# Allegro board Iris.brd
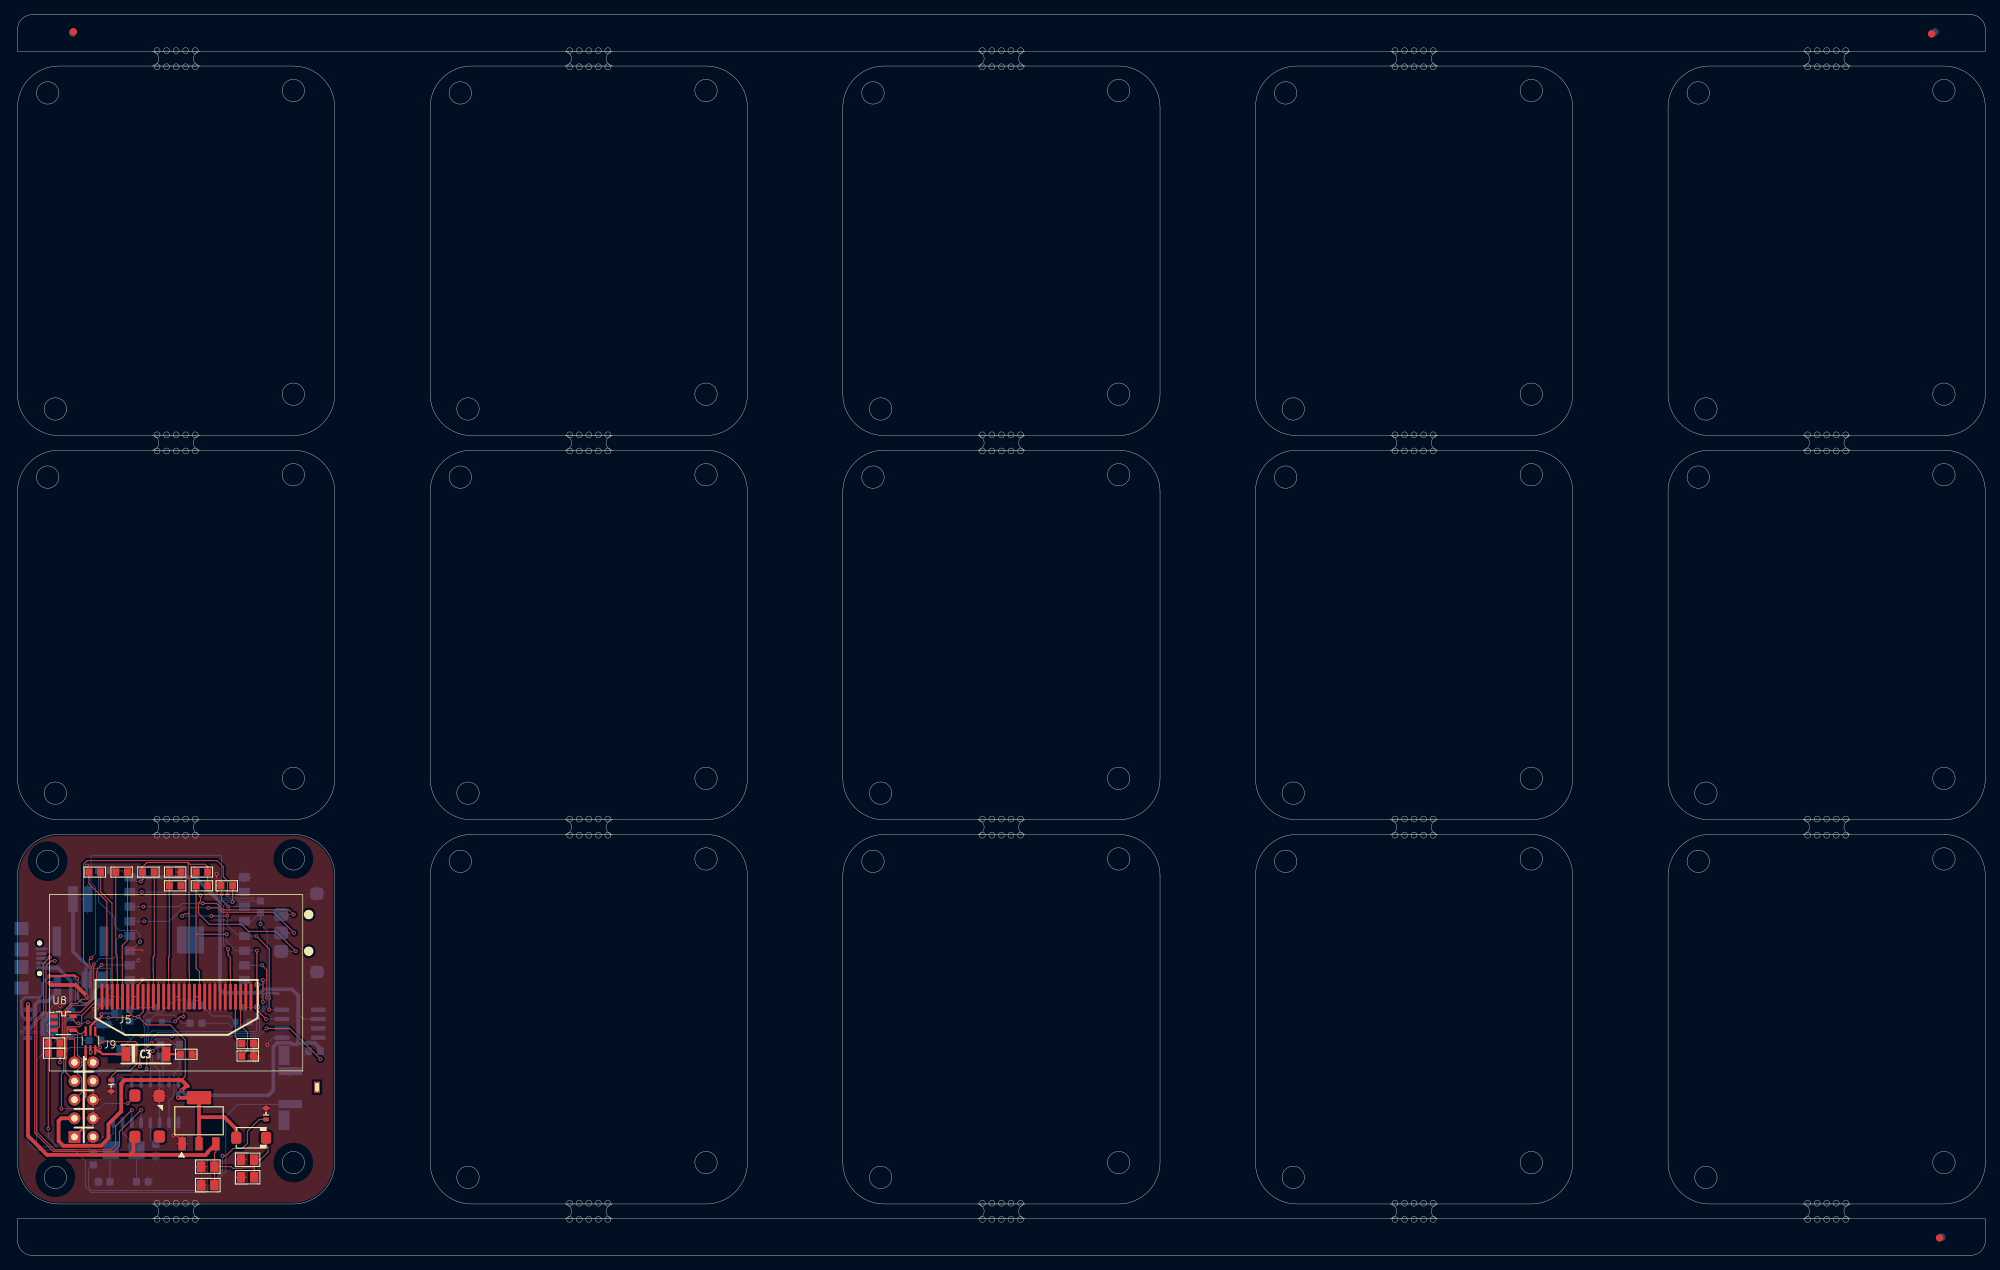
[diagram p0: board, top side]
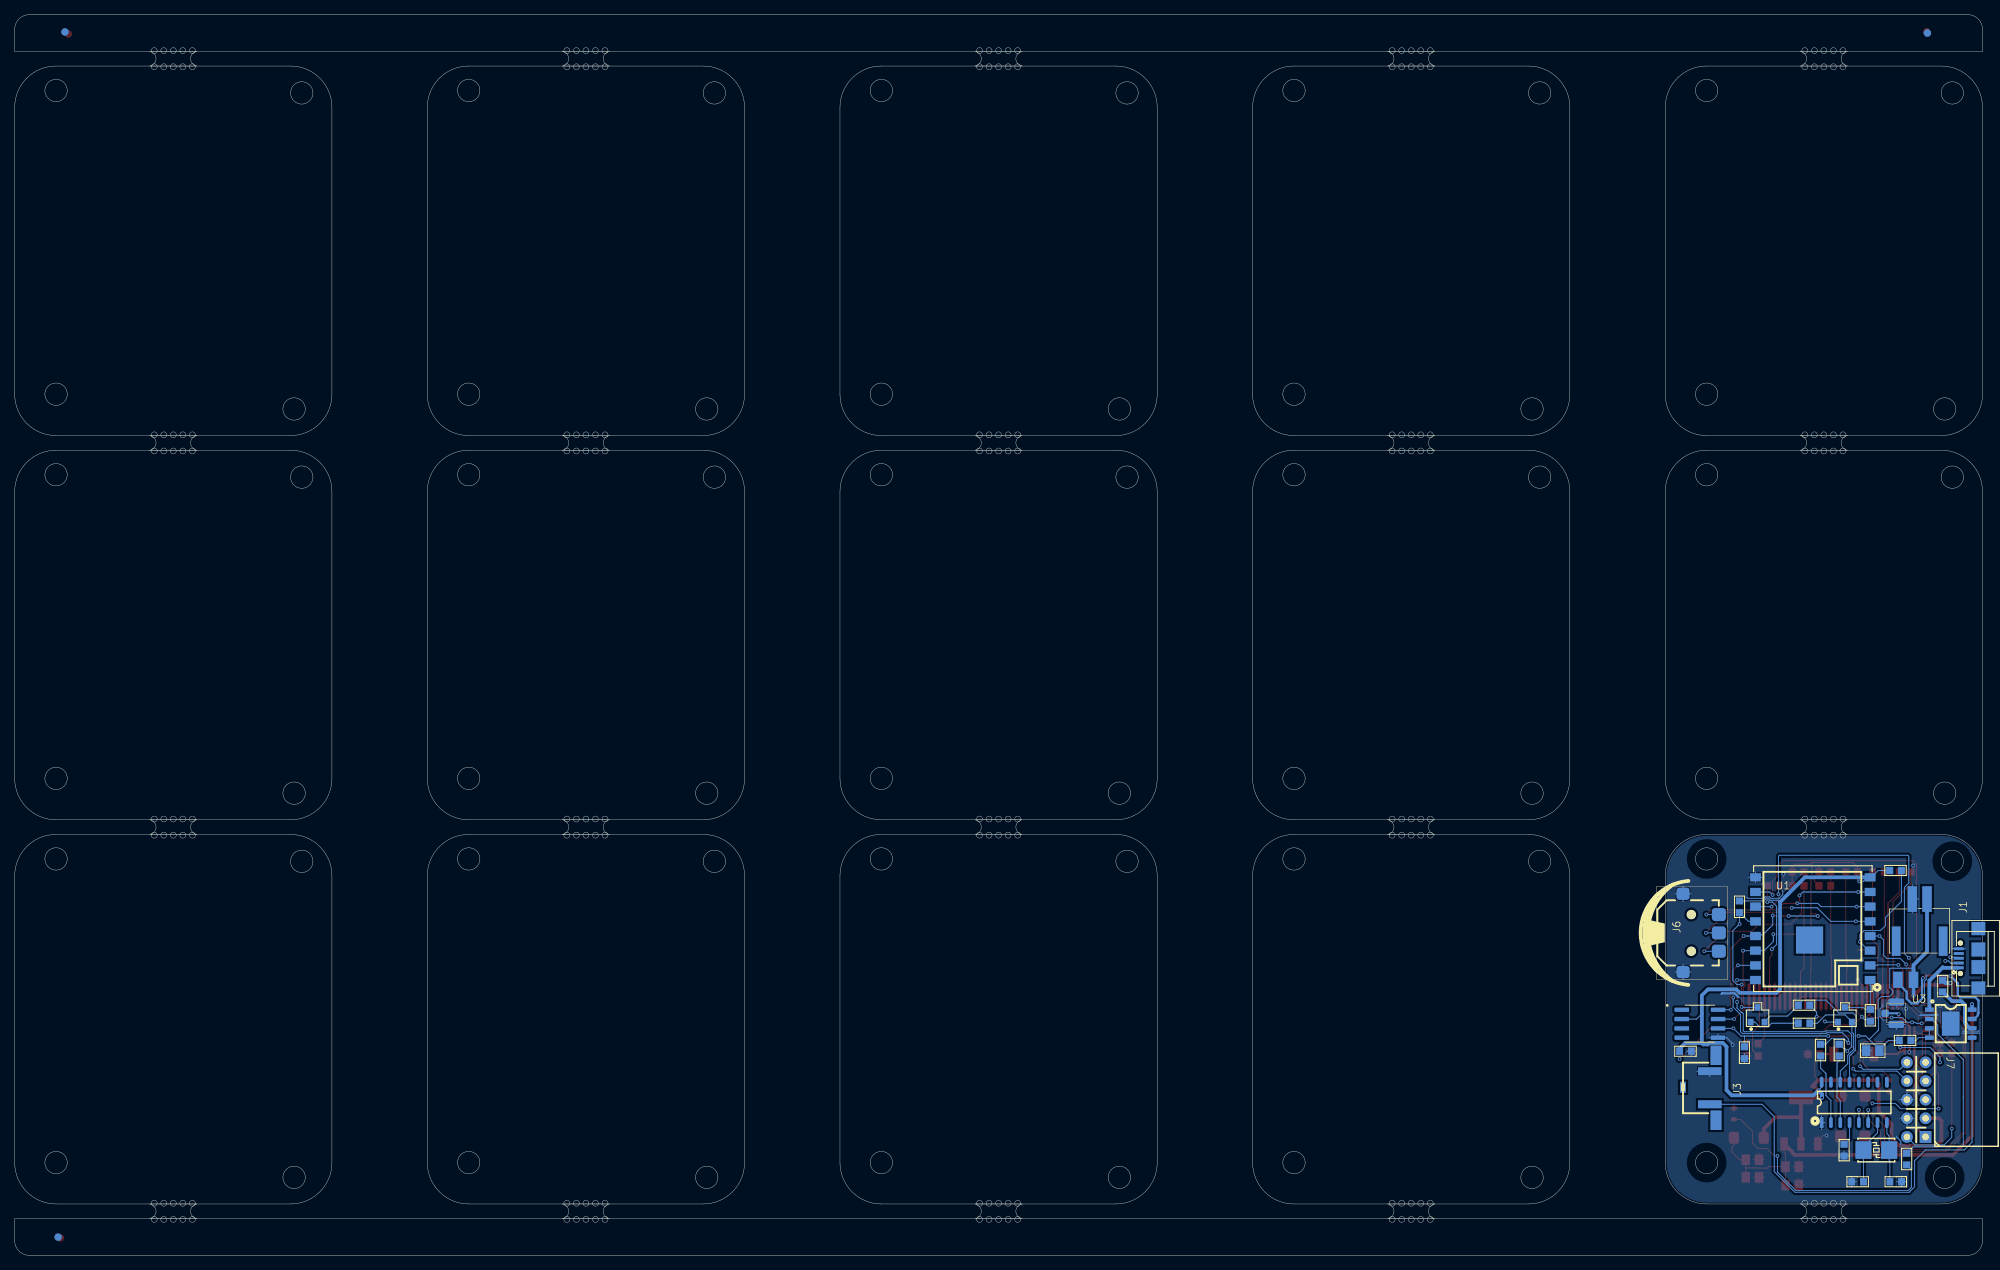
[diagram p1: board, bottom side, seen from below]

Outline 268.15 x 169.11 mm; copper layers: TOP, BOTTOM. Coordinates in mm from the lower left corner of the outline.

## Placement (name value [footprint] x y rotation side)
C1  100NF  [C0603]  18.86 13.54 90 bottom
C2  20pf  [C0603]  17.81 10.03 180 bottom
C3  20pf  [C0603]  12.62 10.03 180 bottom
C4  22UF  [C0805]  15.85 27.9 180 bottom
C5  22UF  [C0805]  32.26 10.64 180 top
C6  22UF  [C0805]  26.84 9.57 180 top
C7  22UF  [C0805]  26.84 12.09 180 top
C8  22UF  [C0805]  32.26 13.03 180 top
C9  1UF  [C0603]  9.74 52.24 0 top
C10  1UF  [C0603]  13.39 52.24 0 top
C11  4.7UF  [C0603]  20.68 52.24 0 top
C12  1UF  [C0603]  30.57 28.85 0 top
C13  1UF  [C0603]  30.57 27.17 0 top
C14  100NF  [C0603]  41.28 27.82 180 bottom
C15  100NF  [C0603]  32.44 28.43 270 bottom
D1  LED_GREEN  [LED_0603]  33.87 19.29 90 top
D2  LED_GREEN  [LED_0603]  12.76 23.12 270 top
D3  SS34  [DO-214AC]  31.84 16.02 0 top
J1  Micro USB  [MICRO_USB_2_0_SMT]  3.24 40.49 90 bottom
J2  PH2.0  [PH2_0_2PIN]  8.56 45.69 0 bottom
J3  KEY  [6X6-SMD-KEY]  38.56 22.84 90 bottom
J5  SH1106  [OLED-12864]  21.66 35.25 0 top
J6  wheel switch  [BUTTONPUSHLEVEL]  39.48 43.95 90 bottom
J7  hdr2_54-2x5p  [HDR2_54-2X5P]  9.03 21.22 90 bottom
J8  IPX-1  [IPX_SMA]  11.75 32.99 0 bottom
J9  antenna  [AB-C03]  16.8 29.3 270 top
L1  TFM252012ALMA4R7MTAA  [INDC2520X120N]  10.46 37.56 180 bottom
NOREF  -  [unnamed]  261.92 2.38 0 top
NOREF#2  -  [unnamed]  260.84 166.49 0 top
NOREF#3  -  [unnamed]  7.6 166.78 0 top
NOREF#4  -  [unnamed]  261.3 166.75 180 bottom
NOREF#5  -  [unnamed]  7.51 166.6 180 bottom
NOREF#6  -  [unnamed]  262.23 2.48 180 bottom
Q1  SI2302  [SOT23]  18.75 32.79 180 bottom
Q2  SI2302  [SOT23]  30.65 32.79 180 bottom
R1  0R  [R0603]  22.06 28.78 270 bottom
R2  0R  [R0603]  19.53 28.78 270 bottom
R3  1K  [R0603]  11.35 29.3 180 bottom
R4  5K1  [R0603]  25.12 34.09 180 bottom
R5  5K1  [R0603]  23.52 31.64 0 bottom
R7  0.5R  [R0603]  5.42 35.91 90 bottom
R8  4K7  [R0603]  17.03 52.24 0 top
R9  4K7  [R0603]  20.68 50.37 0 top
R10  4K7  [R0603]  24.33 52.24 0 top
R11  4K7  [R0603]  24.33 50.37 0 top
R12  560K  [R0603]  27.72 50.37 0 top
R13  4K7  [R0603]  15.29 33.52 270 bottom
R14  4K7  [R0603]  11.05 52.46 0 bottom
R15  4K7  [R0603]  33.11 46.71 90 bottom
R16  1K  [R0603]  5.79 27.54 180 top
R17  10K  [R0603]  4.19 28.94 0 top
R21  1K  [R0603]  10.33 13.93 270 bottom
R22  NC  [R0603]  23.79 27.41 180 top
U1  esp-07s  [ESP-07S]  26.64 47.95 90 bottom
U2  CH340G  [SOP16_L]  17.48 20.85 90 bottom
U3  IP5306  [ESOP-8]  4.33 31.84 270 bottom
U4  AMS1117_3V3  [SOT_223]  24.73 18.34 0 top
U5  WS2812  [LED_5050_WS2812B]  17.65 18.96 90 top
U6  DS3231MZ+TRL  [SOIC127P600X175-8N]  38.51 31.57 180 bottom
U8  SN74LVC1G14  [SOT23-5]  6.27 31.64 270 top
U9  XA17-G4K  [SOT-363]  9.94 29.28 90 top
Y1  12M_SMT  [OSC_5032-2P]  14.47 14.34 0 bottom

## Library data of the parts
C1-C15 = CAP NP
D1 D2 = LED_1
D3 = DIODE 34/DPAK_0
J1 = Micro USB
J2 = PH2.0
J3 = KEY
J5 = SH1106
J6 = wheel switch
J7 = hdr2_54-2x5p
J8 = IPX-1
J9 = antenna
L1 = TFM252012ALMA4R7MTAA
Q1 Q2 = IRLI540N/TO_2
R1-R5 R7-R17 R21 R22 = R
U1 = esp-07s
U2 = CH340G_0
U3 = IP5306_0
U4 = MCP1792/3_2
U5 = WS2812
U6 = DS3231MZ+TRL
U8 = SN74LVC1G14
U9 = XA17-G4K
Y1 = ZTA

## Footprints (pads in the part's own frame, mm; a bottom-side part is the same pattern mirrored in y, then rotated)
6X6-SMD-KEY
  rect 2.65x1.5 smd: (-4.425,-2.25) (4.425,-2.25)
  rect 1.5x0.8 hole 1.2x0.5: (0.075,2.25)
  rect 1.1x3.2 smd: 1(-2.25,-1.4) 2(2.25,-1.4)
AB-C03
  rect 2x1.2 smd: 1(1.87,-2.017) 2(1.87,3.444)
BUTTONPUSHLEVEL
  round 1.3 hole 1.219: (-2.5,0.2) (2.5,0.2)
  custom 1.778x1.905 smd: 1(-2.5,-3.556) 2(0,-3.556) 3(2.5,-3.556)
  custom 1.676x1.778 smd: 4(5.334,1.321) 5(-5.334,1.321)
C0603
  rect 0.95x1 smd: 1(0,0) 2(1.6,0)
C0805
  rect 1.15x1.45 smd: 1(0,0) 2(1.8,0)
DO-214AC
  custom 1.397x1.651 smd: 1(-2.032,0) 2(2.032,0)
ESOP-8
  rect 0.6x1.2 smd: 1(-1.643,-2.908) 2(-0.373,-2.908) 3(0.897,-2.908) 4(2.167,-2.908) 5(2.167,2.908) 6(0.897,2.908) 7(-0.373,2.908) 8(-1.643,2.908)
  rect 3.3x2.4 smd: 9(0.262,0)
ESP-07S
  rect 1.12x1.465 smd: 1(-10.424,-11.331) 2(-8.424,-11.331) 3(-6.424,-11.331) 4(-4.424,-11.331) 5(-2.424,-11.331) 6(-0.424,-11.331) 7(1.576,-11.331) 8(3.576,-11.331) 9(3.576,4.285) 10(1.576,4.285) 11(-0.424,4.285) 12(-2.424,4.285) 13(-4.424,4.285) 14(-6.424,4.285) 15(-8.424,4.285) 16(-10.424,4.285)
  rect 3.7x3.7 smd: 17(-4.974,-3.073)
HDR2_54-2X5P
  rect 1.6x1.6 hole 0.9: 1(-5.08,-1.27)
  round 1.6 hole 0.9: 2(-5.08,1.27) 3(-2.54,-1.27) 4(-2.54,1.27) 5(0,-1.27) 6(0,1.27) 7(2.54,-1.27) 8(2.54,1.27) 9(5.08,-1.27) 10(5.08,1.27)
INDC2520X120N
  rect 1.3x2.22 smd: 1(-1.06,0) 2(1.06,0)
IPX_SMA
  custom 1.016x1.016 smd: 1(1.524,0)
  custom 2.134x1.016 smd: 2(0,1.524) 3(0,-1.524)
LED_0603
  custom 0.559x0.762 smd: 1(-0.762,0) 2(0.762,0)
LED_5050_WS2812B
  custom 1.676x1.524 smd: 1(-2.819,1.651) 2(-2.769,-1.676) 3(2.769,-1.651) 4(2.819,1.651)
MICRO_USB_2_0_SMT
  rect 1.8x1.9 smd: (-4.05,-2.675) (4.05,-2.675)
  round 0.711 hole 0.7: (-2.075,-0.225) (2.075,-0.225)
  rect 1.9x1.9 smd: (-1.2,-2.675) (1.2,-2.675)
  rect 0.4x1.35 smd: 1(-1.3,0) 2(-0.65,0) 3(0,0) 4(0.65,0) 5(1.3,0)
OLED-12864
  custom 0.4x3.5 smd: 1(-10.15,0) 2(-9.45,0) 3(-8.75,0) 4(-8.05,0) 5(-7.35,0) 6(-6.65,0) 7(-5.95,0) 8(-5.25,0) 9(-4.55,0) 10(-3.85,0) 11(-3.15,0) 12(-2.45,0) 13(-1.75,0) 14(-1.05,0) 15(-0.35,0) 16(0.35,0) 17(1.05,0) 18(1.75,0) 19(2.45,0) 20(3.15,0) 21(3.85,0) 22(4.55,0) 23(5.25,0) 24(5.95,0) 25(6.65,0) 26(7.35,0) 27(8.05,0) 28(8.75,0) 29(9.45,0) 30(10.15,0)
OSC_5032-2P
  rect 2.2x2.4 smd: 1(-1.75,0) 2(1.75,0)
PH2_0_2PIN
  rect 1.2x4 smd: (-3.2,2.875) (3.2,2.875)
  rect 1.3x3.5 smd: 1(1,-2.875) 2(-1,-2.875)
R0603
  rect 0.95x1 smd: 1(0,0) 2(1.6,0)
SOIC127P600X175-8N
  custom 1.97x0.59 smd: 1(-2.475,1.905) 2(-2.475,0.635) 3(-2.475,-0.635) 4(-2.475,-1.905) 5(2.475,-1.905) 6(2.475,-0.635) 7(2.475,0.635) 8(2.475,1.905)
SOP16_L
  rect 1.5x0.5 smd: 1(-2.752,4.445)
  oval 1.5x0.5 smd: 2(-2.752,3.175) 3(-2.752,1.905) 4(-2.752,0.635) 5(-2.752,-0.635) 6(-2.752,-1.905) 7(-2.752,-3.175) 8(-2.752,-4.445) 9(2.752,-4.445) 10(2.752,-3.175) 11(2.752,-1.905) 12(2.752,-0.635) 13(2.752,0.635) 14(2.752,1.905) 15(2.752,3.175) 16(2.752,4.445)
SOT23
  rect 0.8x0.9 smd: 1(-0.95,-1) 2(0.95,-1) 3(0,1)
SOT23-5
  rect 0.508x1.016 smd: 1(-0.95,-1.3) 2(0,-1.3) 3(0.95,-1.3) 4(0.95,1.3) 5(-0.95,1.3)
SOT-363
  custom 1.3x0.3 smd: 1(-1.275,0.65) 2(-1.275,0) 3(-1.275,-0.65) 4(1.275,-0.65) 5(1.275,0) 6(1.275,0.65)
SOT_223
  rect 1.016x1.803 smd: 1(-2.3,-3.15) 2(0,-3.15) 3(2.3,-3.15)
  rect 3.302x1.803 smd: 4(0,3.15)
unnamed
  round 1.016 smd: (0,0)

## Nets
3V3: C14.1 D3.1(ANODE) J5.6(VBAT) J5.9(VDD) J7.3 R8.1 R9.2 R10.2 R11.2 R13.2 R14.2 R15.2 U1.8(VCC) U2.16(VCC) U4.2(VOUT) U4.4(VOUT_) U6.2(VCC) U8.5(VCC)
5V: C5.1 C6.1 C7.1 C8.1 D3.2(CATHODE) U3.8(VOUT) U4.3(VIN) U5.1(VDD)
GND: C1.1 C2.1 C3.2 C4.1 C5.2 C6.2 C7.2 C8.2 C11.2 C12.2 C13.2 C14.2 C15.2 D1.2(CATHODE) D2.2(CATHODE) J1.5(GND) J2.1 J3.2 J5.1(NC/GND) J5.7(VSS#7) J5.8(VSS#8) J5.10(NC) J5.12(BS2) J5.13(CS#) J5.15(D/C#) J5.16(R/W#) J5.17(E/RD#) J5.21(D3) J5.22(D4) J5.23(D5) J5.24(D6) J5.25(D7) J5.29(NC/) J5.30(NC/GND/) J6.4 J6.5 J7.4 J7.6 J8.2 J8.3 R12.1 R17.1 R22.1 U1.9(GND) U2.1(GND) U3.9(GND) U4.1(GND) U5.3(VSS) U6.5(GND) U8.3(GND) U9.2(GND)
ADC: J7.5 U1.2(ADC)
BAT: C4.2 C15.1 J2.2 L1.2 R3.1 R7.2 U6.6(VBAT)
BOOT: Q2.3(D) R15.1 U1.12(IO0)
BUTTON_A: J6.2 U1.5(IO14)
BUTTON_DOWN: J6.1 U1.7(IO13)
BUTTON_UP: J6.3 U1.6(IO12)
DTR#: Q2.2(S) R4.1 U2.13(DTR)
IO2: J7.7 U1.11(IO2)
IO16: J7.9 U1.4(IO16)
ISP_RX: J7.10 R1.1 U1.15(RX)
ISP_TX: J7.8 R2.1 U1.16(TX)
RF_BOARD: J9.1 U9.3(J2)
RF_OUT: J7.1 U9.1(J3)
RING: U1.10(IO15) U5.4(DIN)
RST: Q1.3(D) R13.1 U1.1(RST)
RTS#: Q1.2(S) R5.1 U2.14(RTS)
SCL: J5.18(D0) R10.1 U1.13(IO4) U6.8(SCL)
SDA: J5.19(D1) J5.20(D2) R11.1 U1.14(IO5) U6.7(SDA)
SIG_BOARD: J8.1(SIG) U9.5(J1)
USB_D+: J1.3(D+) U2.5(UD+)
USB_D-: J1.2(D-) U2.6(UD-)
V_IN: J1.1(VBUS) U3.1(VIN)
VTCL: D2.1(ANODE) R16.1 R17.2 U8.2(A) U9.4(V1)
VTCL_IN: J7.2 R16.2
N15621542: C1.2 U2.4(V3)
N15621550: Q1.1(G) R4.2
N15621598: Q2.1(G) R5.2
N15621710: C3.1 U2.8(XO) Y1.1
N15621738: C2.2 U2.7(XI) Y1.2
N15621988: R1.2 U2.2(TXD)
N15622004: R2.2 U2.3(RXD)
N15624178: R7.1 U3.6(BAT)
N15624252: R3.2 U3.3(LED2) U3.4(LED3)
N15625011: J3.1 U3.5(KEY)
N15626203: L1.1 U3.7(SW)
N15629286: C9.1 J5.2(C2P)
N15629352: C10.1 J5.4(C1P)
N15629653: J5.11(BS1) R8.2
N15630916: C9.2 J5.3(C2N)
N15630923: C10.2 J5.5(C1N)
N15630993: C11.1 J5.14(RES#) R9.1
N15631879: J5.26(IREF) R12.2
N15632070: C12.1 J5.27(VCOMH)
N15632325: C13.1 J5.28(VCC)
N15636223: R14.1 U1.3(EN)
N15654880: J9.2 R22.2
N15660228: U8.4(Y) U9.6(V2)
N15662312: R21.1 U3.2(LED1)
N15662512: D1.1(ANODE) R21.2

Pads without a net: J1 4; U1 17; U2 9 10 11 12 15; U5 2; U6 1 3 4; U8 1

## Via types
v1: diameter 0.508, hole 0.305, TOP to BOTTOM, 76 vias

## Routing (per net, layer and track width the routed paths; a pad name or vN(x,y) marks a point on that pad's centre or on a via; arc(x,y) is an arc through that point)
3V3: length 181.5
  TOP w0.127: v1(12.38,32.41) 15.04,32.41 15.48,32.84 ; R9.2 22.28,50.4 22.89,51.01 22.89,51.14 23.25,51.5 23.25,53.54 ; R11.2 R10.2 25.93,52.96 25.58,53.31 23.48,53.31 23.25,53.54 ; J5.9 17.11,33.19 v1(16.45,32.53) ; 15.48,32.84 15.79,32.53 v1(16.45,32.53) ; 15.48,32.84 15.01,33.31 J5.6 ; v1(16.45,32.53) 17.58,31.4 20.81,31.4 22.85,29.36 22.85,24.39 22.36,23.89 22.35,23.9 ; 23.25,53.54 17.64,53.54 17.03,52.93 R8.1 17.11,52.16 17.11,51.29 v1(16.8,50.97) ; v1(8.29,31.62) 8.04,31.62 7.57,32.09 U8.5
  TOP w0.5: D3.1 29.81,17.22 28.2,18.83 24.79,18.83 24.73,18.77 ; v1(21.86,21.49) U4.4 24.73,18.77 ; 24.73,18.77 U4.2 ; v1(22.37,22.47) 22.95,23.05 23.2,23.05 22.36,23.89 14.64,23.89 14.13,23.38 14.13,19.62 12.39,17.88 12.39,15.95 11.37,14.93 6.24,14.93 5.59,15.57 5.59,18.33 5.95,18.68 J7.3
  BOTTOM w0.127: v1(12.38,32.41) 10.9,32.41 10.25,31.76 v1(9.59,31.76) 9.15,31.76 9.01,31.62 v1(8.29,31.62) ; R13.2 15.48,32.11 16.03,32.11 v1(16.45,32.53) ; 27.59,48.15 27.84,48.4 28.94,48.4 29.13,48.6 29.5,48.6 29.79,48.31 R15.2 ; U6.2 38.96,32.21 38.24,32.92 ; R14.2 14.2,52.46 15.14,51.53 U1.8 ; v1(22.37,22.47) 21.92,22.92 U2.16 ; v1(16.8,50.97) 16.24,50.97 15.68,51.53
  BOTTOM w0.5: 38.24,28.94 38.24,28.94 38.24,35.43 37.42,36.25 33.56,36.25 33.09,35.78 28.07,35.78 27.59,36.26 27.59,48.15 24.21,51.53 U1.8 ; 38.24,28.94 38.05,28.75 37.44,28.75 37.22,28.97 35.4,28.97 34.88,28.44 34.88,22.51 34.18,21.81 23.03,21.81 v1(22.37,22.47) 21.86,21.96 v1(21.86,21.49) ; 38.24,28.94 40.51,28.94 41.28,28.17 C14.1
5V: length 66.8
  TOP w0.127: C7.1 29.1,12.09 29.32,11.87 30.56,11.87 30.61,11.92 32.24,11.92 32.26,11.9 ; C7.1 26.84,13.91 27.03,14.1 U4.3 ; C7.1 C6.1 ; 32.26,11.9 C8.1 33.09,13.03 34.14,14.08 34.14,14.74 33.87,15 D3.2 ; 32.26,11.9 C5.1
  TOP w0.5: v1(1.42,34.23) 1.42,16.29 4.02,13.69 15.29,13.69 ; 15.29,13.69 15.79,14.19 15.79,15.93 U5.1 ; 15.29,13.69 22.23,13.69 22.25,13.67 25.6,13.67 25.91,13.98 25.91,14.07 U4.3
  BOTTOM w0.5: U3.8 v1(1.42,34.23)
GND: length 191.3
  TOP w0.127: D2.2 12.76,22.82 ; D2.2 12.2,22.36 ; D2.2 13.32,22.36 ; D2.2 12.76,21.9 ; 28.31,33.32 J5.25 28.31,37.18 ; C6.2 25.79,9.57 ; C6.2 25.04,8.67 ; C6.2 24.29,9.57 ; C6.2 25.04,10.47 ; C8.2 30.46,13.93 ; C8.2 31.21,13.03 ; C8.2 29.71,13.03 ; 31.11,33.32 J5.29 31.11,37.18 ; J5.16 22.01,37.18 ; J5.16 J5.15 ; J5.16 22.01,33.32 ; D1.2 33.87,20.51 ; D1.2 33.31,20.05 ; D1.2 34.43,20.05 ; D1.2 33.87,19.6 ; 25.04,11.19 C7.2 ; C7.2 25.04,12.99 ; C7.2 25.79,12.09 ; C7.2 24.29,12.09 ; J5.15 21.31,37.18 ; J5.15 21.31,33.32 ; 3.54,28.94 R17.1 4.19,29.62 ; 9.98,28.21 v1(9.98,27.71) 9.98,27.58 ; 26.21,33.32 J5.22 26.21,37.18 ; 26.91,37.18 J5.23 26.91,33.32 ; J7.6 11.28,21.22 ; J7.6 10.3,22.2 ; J7.6 10.3,20.24 ; J7.4 10.3,19.66 ; J7.4 11.28,18.68 ; J7.4 10.3,17.7 ; 5.7,33.39 5.7,31.17 5.22,30.69 U8.3 ; 25.51,33.32 J5.21 25.51,37.18 ; 4.05,32.44 4.05,32.95 4.47,33.37 ; 19.21,37.18 J5.12 19.21,33.32 ; v1(9.45,53.13) 9.52,53.2 9.77,53.2 ; C13.2 32.82,27.17 ; C13.2 32.17,27.85 ; C13.2 31.52,27.17 ; C13.2 32.17,26.49 ; 19.91,37.18 J5.13 19.91,33.32 ; 27.07,50.37 R12.1 27.72,51.05 ; 22.43,15.58 21.68,16.33 v1(21.26,16.33) ; 22.43,15.58 22.43,16.27 ; 22.43,15.58 U4.1 ; 32.17,28.17 C12.2 ; C12.2 32.17,29.53 ; C12.2 32.82,28.85 ; R22.1 23.79,28.09 ; R22.1 24.44,27.41 ; R22.1 23.79,26.73 ; 19.3,20.71 U5.3 ; U5.3 19.3,22.75 ; U5.3 20.24,21.73 ; U5.3 18.36,21.73 ; 21.74,15.19 U4.1 ; U4.1 23.11,15.19 ; 14.98,41.51 15.11,41.64 16.95,41.64 17.08,41.51 ; 10.88,33.59 11.51,34.22 J5.1 ; 15.64,37.87 15.71,37.8 J5.7 J5.8 16.41,36.8 17.01,37.4 v1(17.01,37.6) ; 22.71,37.18 J5.17 22.71,33.32 ; 31.81,37.18 J5.30 31.81,33.32 ; 22.28,51.56 C11.2 ; C11.2 21.63,52.24 ; C11.2 22.28,52.92 ; 30.46,9.74 C5.2 ; C5.2 31.21,10.64 ; C5.2 29.71,10.64 ; 27.61,37.18 J5.24 27.61,33.32 ; 27.12,51.43 v1(27.12,51.99) ; 17.81,33.32 J5.10 17.81,37.18
  BOTTOM w0.127: J7.6 11.28,21.22 ; J7.6 9.32,21.22 ; J7.6 10.3,22.2 ; J6.4 40.8,50.3 ; J6.4 41.87,49.28 ; J6.4 40.8,48.27 ; J6.4 39.73,49.28 ; 32.44,26.18 C15.2 ; C15.2 33.12,26.83 ; C15.2 32.44,27.48 ; C15.2 31.76,26.83 ; C2.1 18.46,10.03 ; C2.1 17.16,10.03 ; C2.1 17.81,9.35 ; C2.1 17.81,10.71 ; 8.73,48.57 J2.1 ; J2.1 9.56,50.49 ; J2.1 9.56,46.64 ; 9.32,18.68 J7.4 ; J7.4 11.28,18.68 ; J7.4 10.3,17.7 ; 6.05,32.69 6.54,32.69 6.56,32.7 7.92,32.7 7.93,32.69 8.55,32.69 8.56,32.68 ; 39.68,27.14 C14.2 ; C14.2 40.33,27.82 ; C14.2 39.03,27.82 ; U1.9 31.83,51.53 ; U1.9 30.01,51.53 ; U1.9 30.92,50.79 ; U1.9 30.92,52.26 ; 13.44,32.01 13.97,32.54 13.97,33.58 13.6,33.95 13.6,34.21 ; J6.5 41.87,38.62 ; J6.5 39.73,38.62 ; J6.5 40.8,39.63 ; J6.5 40.8,37.6 ; 11.02,9.35 C3.2 ; C3.2 10.37,10.03 ; C3.2 11.02,10.71 ; C3.2 11.67,10.03 ; 18.18,13.54 C1.1 ; C1.1 19.54,13.54 ; C1.1 18.86,14.19 ; C1.1 18.86,12.89 ; U3.9 4.33,33.42 5.07,34.16 5.09,34.16 ; 11.7,16.22 11.7,16.14 11.13,15.57 11.13,15.13 ; J8.3 11.75,35.2 ; J8.3 11.75,33.83 ; J8.3 12.99,34.51 ; 37.16,24.36 J3.2 38.94,25.09 ; 7.9,34.45 7.9,37.37 7.67,37.6 7.67,38.08 7.56,38.19 ; U2.1 21.92,19.03 ; U2.1 22.35,18.1 ; U2.1 21.5,18.1 ; U2.1 21.92,17.17 ; 10.5,31.47 J8.2 ; J8.2 12.99,31.47 ; J8.2 11.75,30.78 ; 2.67,30.47 2.57,30.57 2.21,30.57 2.1,30.45 0.74,30.45 0.6,30.59 0.37,30.59 ; 6.15,32.86 8.48,32.86 ; 15.85,27 C4.1 ; C4.1 15.85,28.8 ; C4.1 15.1,27.9 ; C4.1 16.6,27.9 ; 34.05,28.46 v1(34.05,28.67) 34.05,28.86 34.86,29.67 U6.5 ; 4.09,41.79 J1.5 2.39,41.79 ; U6.5 37.2,29.67 ; U6.5 36.03,30.14 ; 0.36,30.28 2.67,30.28 2.7,30.31 ; 32.15,48.78 32.03,48.66 29.8,48.66 29.61,48.85 29.03,48.85 28.84,48.66 27.72,48.66 27.22,49.16 27.22,49.71
  BOTTOM w0.3: 35.57,35.61 35.46,35.72 33.78,35.72 33.25,35.19
  vias: v1(5.78,34) v1(10.41,33.62) v1(16.47,40.2)
ADC: length 27.4
  TOP w0.127: J7.5 8.75,22.21 8.75,24.17 8.16,24.76 8.16,25.3 8.75,25.89 8.75,26.71 8.16,27.3 8.16,30.08 6.99,30.08 6.86,30.21 6.86,31.03 6.99,31.16 8.46,31.16 8.75,31.45 8.75,32.69 10.75,34.69 10.75,38.66 10.87,38.78 10.87,39 v1(11.46,39.59)
  BOTTOM w0.127: U1.2 14.38,39.53 14.32,39.59 v1(11.46,39.59)
BAT: length 73.2
  TOP w0.127: v1(16.88,29.9) v1(21.03,29.9) ; v1(33.94,30.94) 37.09,30.94 v1(41.28,26.75)
  TOP w0.5: v1(9.4,35.37) 7.92,36.85 4.64,36.85 v1(4.37,37.12)
  BOTTOM w0.127: 15.43,29.43 15.9,29.9 v1(16.88,29.9) ; 15.43,29.43 14.05,28.05 ; 15.43,29.43 14.17,30.69 14.17,32.24 14.23,32.3 14.23,34.82 13.77,35.28 12.66,35.28 12.23,35.71 12.23,36.07 12.65,36.49 12.65,39.05 12.56,39.14 9.68,39.14 9.4,38.86 ; R3.1 12.8,29.3 14.05,28.05 ; C15.1 32.44,29.87 32.41,29.9 ; v1(21.03,29.9) 32.41,29.9 ; 32.41,29.9 32.91,29.9 v1(33.94,30.94) U6.6 ; 14.05,28.05 C4.2
  BOTTOM w0.5: v1(4.37,37.12) 5.03,37.12 R7.2 ; v1(9.4,35.37) L1.2 9.4,39.56 7.56,41.4 J2.2
BOOT: length 19
  TOP w0.127: v1(32.82,33.85) v1(32.82,36.92)
  BOTTOM w0.127: v1(32.82,36.92) 33.47,36.92 34.02,37.47 34.02,44.24 v1(33.11,45.15) R15.1 33.08,46.71 31.9,45.53 U1.12 ; v1(32.82,33.85) 32.76,33.79 Q2.3
BUTTON_A: length 26.3
  TOP w0.127: v1(37.69,43.95) 34.87,46.77 27.9,46.77 27.3,47.37 v1(25.99,47.37)
  BOTTOM w0.127: U1.5 v1(17.26,45.53) 20.68,45.53 22.53,47.37 v1(25.99,47.37) ; J6.2 v1(37.69,43.95)
BUTTON_DOWN: length 29.8
  TOP w0.127: v1(37.92,41.45) 35.21,44.16 31.47,44.16 30.5,45.13 26.15,45.13 24.68,46.6 24.68,48.04 24.94,48.3 v1(24.94,49.06)
  BOTTOM w0.127: J6.1 v1(37.92,41.45) ; v1(24.94,49.06) 24.47,49.53 v1(16.93,49.53) U1.7
BUTTON_UP: length 24.8
  TOP w0.127: v1(25.24,47.97) 27.12,47.97 28.01,47.08 28.93,47.08 28.94,47.09 36.99,47.09 v1(37.63,46.45)
  BOTTOM w0.127: U1.6 v1(17.16,47.53) 21.99,47.53 22.44,47.97 v1(25.24,47.97) ; J6.3 v1(37.63,46.45)
DTR#: length 24.1
  BOTTOM w0.127: Q2.2 29.7,31.84 28.93,32.61 26.57,32.61 25.12,34.07 R4.1 25.12,34.12 24.51,34.73 24.13,34.73 24.07,34.78 21.33,34.78 19.58,33.03 17.66,33.03 17.21,32.58 17.21,31.26 17.33,31.14 17.33,27.94 18.11,27.15 U2.13
IO2: length 62
  TOP w0.127: v1(27.8,49.21) 27.8,48.47 v1(28.74,47.53) ; v1(10.04,40.55) 9.78,40.29 9.78,39.63 10.13,39.28 10.13,35.04 9.17,34.08 7.46,34.08 6.35,32.97 6.35,29.98 6.71,29.62 6.71,28.22 6.71,26.86 6.57,26.72 6.57,24.95 J7.7
  BOTTOM w0.127: v1(10.04,40.55) 10.64,41.15 10.64,50.15 10.04,50.76 10.04,54.4 10.17,54.53 27.67,54.53 27.8,54.4 v1(27.8,49.21) ; U1.11 v1(28.74,47.53)
IO16: length 24.5
  TOP w0.127: v1(10.39,39.65) 10.39,34.94 8.6,33.15 6.89,33.15 6.6,32.87 6.6,30.09 7.19,29.5 7.76,29.5 J7.9
  BOTTOM w0.127: U1.4 v1(14.02,43.53) 13.49,42.99 13.49,40.91 13.05,40.47 11.21,40.47 v1(10.39,39.65)
ISP_RX: length 43.1
  TOP w0.127: v1(33.96,35.13) 33.96,38.91 v1(33.34,39.53) ; v1(16.68,25.76) 16.68,27.36 v1(18.28,28.96)
  BOTTOM w0.127: v1(33.96,35.13) 33.96,34.69 33.99,34.66 33.99,33.84 32.97,32.82 32.97,30.49 32.7,30.23 21.33,30.23 21.21,30.35 19.09,30.35 18.28,29.53 v1(18.28,28.96) 18.9,29.58 20.57,29.58 21.37,28.78 R1.1 ; U1.15 v1(33.34,39.53) ; J7.10 11.24,25.36 16.28,25.36 v1(16.68,25.76)
ISP_TX: length 39.7
  TOP w0.127: v1(18.42,27.83) 17.61,27.02 v1(17.61,25.43) ; v1(33.44,37.53) v1(33.44,34.54)
  BOTTOM w0.127: v1(33.44,34.54) 33.44,33.71 32.83,33.1 32.73,33.1 32.6,32.97 32.6,30.61 32.47,30.48 21.44,30.48 21.32,30.6 18.35,30.6 17.83,30.09 17.83,28.42 v1(18.42,27.83) 18.76,28.17 18.89,28.17 19.5,28.78 R2.1 ; J7.8 11.64,25.11 17.28,25.11 v1(17.61,25.43) ; U1.16 v1(33.44,37.53)
RF_BOARD: length 4.4
  TOP w0.29: J9.1 11.59,27.43 11.22,27.79 11,27.79 10.79,28.01 U9.3
RF_OUT: length 12.6
  TOP w0.29: U9.1 9.29,27.08 9.26,27.05 9.26,26.78 9.23,26.74 9.23,23.32 9.26,23.28 9.26,21.63 8.99,21.36 8.99,18.54 9.04,18.49 9.04,17.42 J7.1
RING: length 73.5
  TOP w0.127: v1(28.6,49.14) 28.6,51.03 28.02,51.61 28.02,52.96 27.18,53.79 9.48,53.79 9,53.31 9,40.05 9.88,39.17 9.88,35.22 9.58,34.93 8.75,34.93 8.16,34.33 7.6,34.33 7.35,34.33 6.1,33.08 6.1,29.88 6.45,29.52 6.45,28.12 6.45,26.96 6.31,26.82 6.31,25.06 5.98,24.72 v1(5.98,19.99) ; U5.4 16,21.7 v1(15,20.71)
  BOTTOM w0.127: v1(15,20.71) 11.88,20.71 11.16,19.99 v1(5.98,19.99) ; v1(28.6,49.14) 28.98,49.53 U1.10
RST: length 7.6
  BOTTOM w0.127: U1.1 15.31,36.78 15.29,36.76 R13.1 15.98,33.52 16.25,33.79 Q1.3
RTS#: length 15.6
  BOTTOM w0.127: U2.14 19.38,25.1 18.37,26.12 18.37,27.25 17.58,28.04 17.58,30.19 17.8,30.41 Q1.2 17.8,31.84 18.73,32.77 21.36,32.77 22.49,31.64 R5.1
SCL: length 43.1
  TOP w0.127: 23.38,46.57 23.38,51.27 24.33,52.22 R10.1 ; 23.38,46.57 22.77,46.57 v1(22.45,46.25) ; 23.38,46.57 23.38,38.69 23.41,38.66 J5.18 ; v1(26.41,46.25) 28.52,46.25 v1(28.59,46.32) ; v1(32.53,43.53) 34.29,41.77 34.29,35.42 34.4,35.31 34.4,34.95 34.29,34.84 v1(34.29,33.48)
  BOTTOM w0.127: U6.8 v1(34.29,33.48) ; v1(28.59,46.32) 28.59,45.04 29.94,43.69 30.76,43.69 U1.13 v1(32.53,43.53) ; v1(22.45,46.25) v1(26.41,46.25)
SDA: length 38.2
  TOP w0.127: v1(32.62,41.53) 32.62,37.35 32.37,37.1 32.37,36.74 32.56,36.55 32.56,34.23 32.37,34.03 32.37,33.67 32.63,33.41 32.65,33.41 v1(33.85,32.21) ; 24.33,43.77 R11.1 ; 24.33,43.77 v1(28.5,43.77) ; 24.33,43.77 24.33,39.14 24.81,38.66 J5.20 J5.19
  BOTTOM w0.127: v1(28.5,43.77) 28.5,42.77 29.74,41.53 U1.14 v1(32.62,41.53) ; U6.7 v1(33.85,32.21)
SIG_BOARD: length 5
  TOP w0.29: U9.5 9.94,31.25 10.89,32.2 11.13,32.2 11.42,32.49 v1(11.42,32.87)
  BOTTOM w0.29: J8.1 11.54,32.99 v1(11.42,32.87)
USB_D+: length 46.8
  TOP w0.127: v1(4.39,40.62) 3.49,39.72 3.49,38.71 3.56,38.64 3.56,33.18 2.36,31.98 2.36,16.68 4.91,14.13 13.1,14.13 13.89,14.92 13.89,16.88 v1(16.84,19.84)
  BOTTOM w0.127: J1.3 3.37,40.62 v1(4.39,40.62) ; U2.5 v1(16.84,19.84)
USB_D-: length 46
  TOP w0.127: v1(5.08,40.13) 4.58,40.13 4.01,39.56 4.01,39.56 3.88,39.43 3.88,33.14 2.63,31.89 2.63,16.81 5.05,14.39 12.68,14.39 13.37,15.07 13.37,17.61 v1(15.57,19.82)
  BOTTOM w0.127: U2.6 v1(15.57,19.82) ; v1(5.08,40.13) 4.63,40.13 4.34,39.84 J1.2
V_IN: length 8.7
  BOTTOM w0.5: U3.1 7.24,37.42 5.4,39.26 5.33,39.19 J1.1
VTCL: length 28.7
  TOP w0.127: 11.52,29.12 11.22,28.82 v1(11.22,28.32) ; 11.52,29.12 10.59,30.06 U9.4 ; 11.52,29.12 16.09,29.12 16.26,28.95 16.26,26.12 15.27,25.13 13.55,25.13 12.95,24.53 12.94,24.53 12.76,24.35 D2.1 ; U8.2 4.27,31.64 4.03,31.4 4.03,30.59 5.04,29.58 5.18,29.58 5.79,28.97 R17.2 5.79,28.25 R16.1 v1(5.79,26.3)
  BOTTOM w0.127: v1(5.79,26.3) 5.79,27 7.11,28.32 v1(11.22,28.32)
VTCL_IN: length 18.5
  TOP w0.127: R16.2 v1(4.19,17.28)
  BOTTOM w0.127: v1(4.19,17.28) 4.19,16.09 5.24,15.03 9.19,15.03 J7.2
N15621542: length 3.3
  BOTTOM w0.127: C1.2 18.83,15.14 18.11,15.86 U2.4
N15621550: length 5.1
  TOP w0.127: v1(22.6,32.53) 22.13,32.53 v1(21.48,31.88)
  BOTTOM w0.127: R4.2 23.52,34.07 22.6,33.15 v1(22.6,32.53) ; v1(21.48,31.88) 21.39,31.79 Q1.1
N15621598: length 6.9
  BOTTOM w0.127: R5.2 28.73,31.64 29.22,31.15 30.37,31.15 31.01,31.79 Q2.1
N15621710: length 8.2
  BOTTOM w0.127: C3.1 12.62,12.85 12.72,12.95 Y1.1 12.72,16.28 13.03,16.6 U2.8
N15621738: length 8.9
  BOTTOM w0.127: C2.2 16.21,12.94 16.22,12.95 Y1.2 16.22,14.78 14.3,16.7 U2.7
N15621988: length 9.7
  BOTTOM w0.127: U2.2 20.65,21.1 21.33,21.77 21.33,24.76 22.06,25.49 R1.2
N15622004: length 9.4
  BOTTOM w0.127: R2.2 19.53,26.52 19.82,26.22 19.82,21.54 19.38,21.1 U2.3
N15624178: length 7.5
  BOTTOM w0.5: U3.6 1.72,30.94 2.29,31.51 2.29,31.65 2.4,31.76 2.4,34.15 2.89,34.64 4.13,34.64 5.39,35.91 R7.1
N15624252: length 3.9
  BOTTOM w0.127: R3.2 9.08,29.3 8.71,29.67 U3.4 U3.3
N15625011: length 64.3
  BOTTOM w0.127: U3.5 1.42,15.42 2.47,14.37 7.77,14.37 9.25,12.89 9.25,9.34 10,8.59 25.54,8.59 28.38,11.43 28.38,18.93 30.05,20.59 J3.1
N15626203: length 21.8
  TOP w0.3: v1(8.12,37.78) 7.74,38.16 6.43,38.16 6.35,38.07 v1(4.34,38.07)
  BOTTOM w0.3: v1(4.34,38.07) 3.36,37.09 3.36,35.47 3.06,35.17 0.97,35.17 0.54,34.75 0.54,33.07 0.62,32.99 0.62,32.9 ; 0.62,32.9 0.53,32.99 ; 0.62,32.9 0.62,32.71 1.12,32.21 U3.7 ; L1.1 11.52,37.1 10.33,35.91 10.33,34.98 9.69,34.34 8.88,34.34 8.24,34.98 8.24,37.66 v1(8.12,37.78)
N15629286: length 18
  TOP w0.127: C9.1 9.74,50.65 12.18,48.21 12.18,38.69 12.21,38.66 J5.2
N15629352: length 17.1
  TOP w0.127: J5.4 13.61,38.66 13.58,38.69 13.58,40.63 13.54,40.67 13.54,41.02 13.39,41.17 C10.1
N15629653: length 17.1
  TOP w0.127: J5.11 18.51,38.66 18.48,38.69 18.48,40.63 18.63,40.79 R8.2
N15630916: length 17.6
  TOP w0.127: C9.2 11.34,49.52 12.88,47.98 12.88,37.22 12.91,37.19 J5.3
N15630923: length 17.3
  TOP w0.127: J5.5 14.31,37.19 14.28,37.22 14.28,40.63 14.26,40.65 14.26,42.22 14.99,42.95 C10.2
N15630993: length 17
  TOP w0.127: J5.14 20.61,38.66 20.58,38.69 20.58,40.63 20.68,40.73 R9.1 C11.1
N15631879: length 16.4
  TOP w0.127: J5.26 29.01,38.66 28.98,38.69 28.98,40.63 28.7,40.91 v1(28.7,41.73) ; R12.2 v1(29.32,48.15)
  BOTTOM w0.127: v1(28.7,41.73) 28.05,42.38 28.05,47.59 28.62,48.15 v1(29.32,48.15)
N15632070: length 6.8
  TOP w0.127: J5.27 29.71,33.31 29.68,33.28 29.68,29.77 30.57,28.88 C12.1
N15632325: length 8.9
  TOP w0.127: J5.28 30.41,33.31 30.38,33.28 30.38,31.35 31.34,30.39 31.34,29.03 31.26,28.96 31.26,28.75 31.34,28.67 31.34,28 31.29,27.95 31.29,27.92 30.57,27.2 C13.1
N15636223: length 15.3
  BOTTOM w0.127: U1.3 15.48,41.53 v1(16.7,42.75) 16.7,43.7 16.12,44.28 13.89,44.28 13.21,44.96 13.21,46.06 11.05,48.22 R14.1
N15654880: length 2
  TOP w0.29: J9.2 21.42,27.43 21.44,27.41 R22.2
N15660228: length 2.1
  TOP w0.127: U8.4 7.96,30.69 8.14,30.5 8.14,30.46 8.4,30.2 8.77,30.2 9.13,30.56 U9.6
N15662312: length 27.5
  BOTTOM w0.127: U3.2 6.94,32.21 6.1,31.38 6.1,30.14 2.61,26.66 2.61,21.53 ; R21.1 10.3,13.93 9.45,14.78 2.84,14.78 2.61,15.01 2.61,21.53 ; 2.61,21.53 2.59,21.53
N15662512: length 34
  TOP w0.127: v1(27.94,13.56) 28.4,13.56 29.4,14.56 30.62,14.56 31.32,15.26 31.32,16.89 32.96,18.53 D1.1
  BOTTOM w0.127: R21.2 10.3,12.33 9.69,11.72 9.69,9.26 10.11,8.84 25.44,8.84 27.94,11.34 v1(27.94,13.56)

## Copper pours and planes (outline as drawn; the poured copper is in the pictures)
GND on TOP: 5.64,7.2 1.79,8.79 0.2,12.64 0.2,51.73 1.79,55.58 5.64,57.17 37.59,57.17 41.44,55.58 43.03,51.73 43.03,12.64 41.44,8.79 37.59,7.2 ; 22 cut-outs
GND on BOTTOM: 5.64,7.2 1.79,8.79 0.2,12.64 0.2,51.73 1.79,55.58 5.64,57.17 37.59,57.17 41.44,55.58 43.03,51.73 43.03,12.64 41.44,8.79 37.59,7.2 ; 19 cut-outs

## Text on the board
COMPVAL_TYPE_TOP: FIGURE | SIZE | 0.3048 | 0.7 | 0.8999 | 1.2192 | 1.1999x0.4999 | DRILL CHART: TOP to BOTTOM | ALL UNITS ARE IN MILLIMETERS | TOLERANCE | +0.0762/-0.0762 | +0.0/-0.0 | PLATED | QTY | 76 | 2 | 9 | 1
